# EAGLE board kkctbn relay (EAGLE 9.6.1)
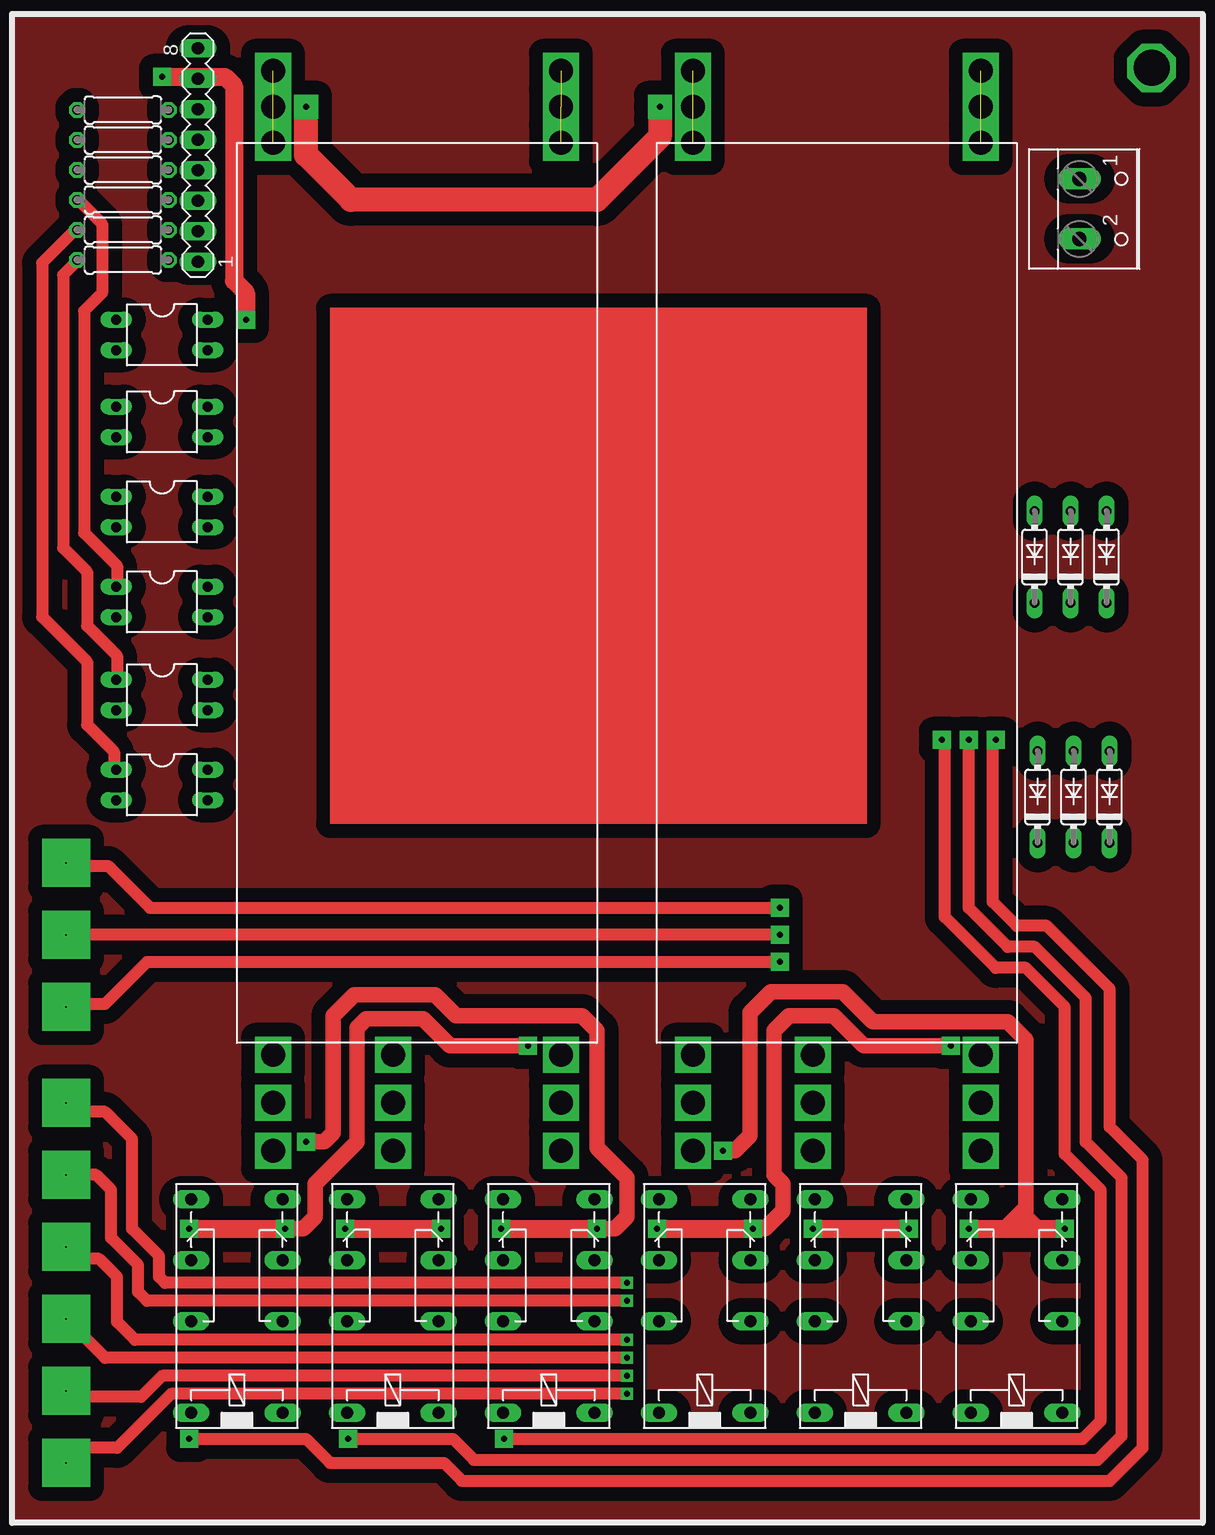
[diagram p0: board, top side]
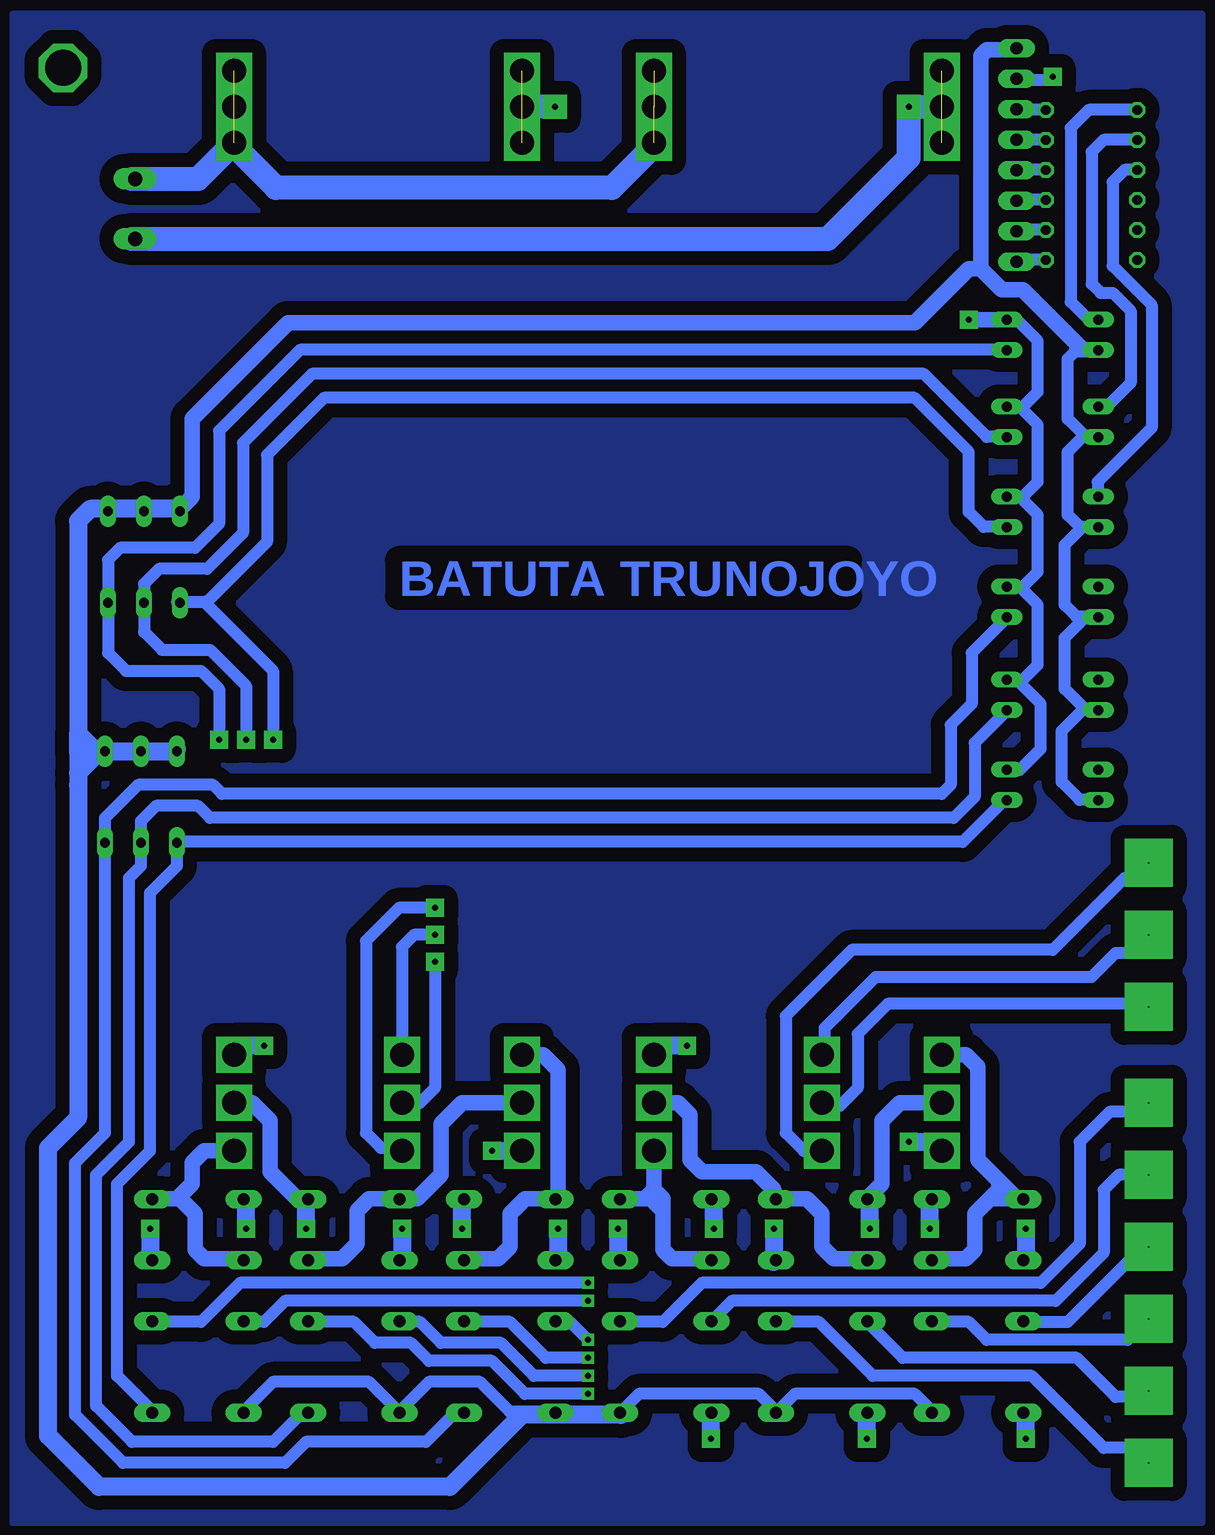
[diagram p1: board, bottom side, seen from below]

No outline drawn. Coordinates in mm, seen from the top.
Copper layers (1*16): Top 0.035mm / dielectric 1.5mm / Bottom 0.035mm
Design rules "default *": minimum track width 6mil, minimum drill 0.35mm, track to track 46mil, track to pad 46mil, pad to pad 6mil, via to via 6mil, smd to smd 46mil, copper to edge 40mil, drill to drill 6mil, minimum pad ring 10mil, minimum via ring 8mil, stop-mask expansion 4mil, vias tented up to drill 0mil, thermal gap 10mil

## Footprints (pad centres in the part's own frame; a part is rotated, then mirrored left to right if it is on the bottom)
DIL04 = drill 0.813 long: 1 -1.27,-3.81; 2 1.27,-3.81; 3 1.27,3.81; 4 -1.27,3.81
MA08-1 = drill 1.016 long: 1 -8.89,0; 2 -6.35,0; 3 -3.81,0; 4 -1.27,0; 5 1.27,0; 6 3.81,0; 7 6.35,0; 8 8.89,0
0207/7 = drill 0.813 octagon: 1 -3.81,0; 2 3.81,0
351 = drill 1.016 long: 1 -3.81,-3.81; 16 -3.81,3.81; O1 8.89,-3.81; O2 8.89,3.81; P1 3.81,-3.81; P2 3.81,3.81; S1 13.97,-3.81; S2 13.97,3.81
DO35-7A = drill 0.813 long: A 3.81,0; C -3.81,0
W237-102 = drill 1.194 long: 1 -2.5,-1.27; 2 2.5,-1.27

## Placement (x,y rotation side)
E$7  [DIL04]  110,69.75 270 top
E$8  [DIL04]  110,62 270 top
E$9  [DIL04]  110,54.5 270 top
E$10  [DIL04]  110,77.25 270 top
E$11  [DIL04]  110,84.75 270 top
E$12  [DIL04]  110,92 270 top
E$13  [MA08-1]  113,107 90 top
E$14  [0207/7]  106.75,98.25 0 top
E$15  [0207/7]  106.75,110.75 0 top
E$16  [0207/7]  106.75,108.25 0 top
E$17  [0207/7]  106.75,105.75 0 top
E$18  [0207/7]  106.75,103.25 0 top
E$19  [0207/7]  106.75,100.75 0 top
E$20  [351]  116.25,6 90 top
E$21  [351]  129.25,6 90 top
E$22  [351]  142.25,6 90 top
E$23  [351]  155.25,6 90 top
E$24  [351]  168.25,6 90 top
E$25  [351]  181.25,6 90 top
E$26  [DO35-7A]  189,53.5 90 top
E$27  [DO35-7A]  188.75,73.5 90 top
E$32  [W237-102]  187.75,102.5 270 top
E$33  [DO35-7A]  183,53.5 90 top
E$34  [DO35-7A]  186,53.5 90 top
E$35  [DO35-7A]  182.75,73.5 90 top
E$36  [DO35-7A]  185.75,73.5 90 top

## Library data of the parts
E$7-E$12 = ic-package
E$13 = con-lstb
E$14-E$19 = rcl
E$20-E$25 = relay
E$26 E$27 E$33-E$36 = diode
E$32 = con-wago-500

## Tracks (layer width: path | path; a pad name or v marks a point on that pad's centre or on a via)
KLM
  pour Top: 97.5,118.75 196.75,118.75 196.75,-7 97.5,-7
MLK
  pour Bottom: 97.5,118.75 196.75,118.75 196.75,-7 97.5,-7
S$1  (via drill 0.1 pad 4)
  other vias: 102,48
S$2  (via drill 0.1 pad 4)
  other vias: 102,42
S$3  (via drill 0.1 pad 4)
  other vias: 102,36
S$4  (via drill 0.1 pad 4)
  other vias: 102,28
S$5  (via drill 0.1 pad 4)
  other vias: 102,22
S$6  (via drill 0.1 pad 4)
  other vias: 102,16
S$7  (via drill 0.1 pad 4)
  other vias: 102,10
S$8  (via drill 0.1 pad 4)
  other vias: 102,4
S$9  (via drill 0.1 pad 4)
  other vias: 102,-2
S$10  (via drill 3 pad 4)
  other vias: 192.5,114.25
S$52  (via drill 0.5 pad 1.5)
  Top 1.3: 158.75,17.5 160.25,17.5 161.75,19 161.75,21.25 161,22 161,34 162.25,35.25 166,35.25 168.5,32.75 v175.75,32.75
  Top 1.5: v159.25,17.5 158.75,17.5 v151.25,17.5
  Bottom 1.5: v159.25,17.5 159.25,20 | v151.25,17.5 151.25,15 | v175.75,32.75 178.25,32.75
S$53  (via drill 0.5 pad 1.5)
  Bottom 1: 113.75,90.75 172.75,90.75 179.5,84 179.5,76.25 181.5,74.25 187.75,74.25 188.75,73.25 188.75,65.5 187.25,64 181,64 179.5,62.5 v179.5,58.25
S$60
  Bottom 1: 113.75,60.75 116.5,58 116.5,53.5 118.25,51.75 180.25,51.75 181.25,52.75 184.75,52.75 186,51.5 186,47.75 187,46.75 187,24.75 189.75,22 189.75,2.75 186.75,-0.25 175,-0.25 172.5,2.25 172,2.25
S$61
  Bottom 1: 113.75,68.5 116.75,65.5 116.75,61.25 118.5,59.5 118.5,54.5 119.25,53.75 179.25,53.75 180,54.5 186.25,54.5 189,51.75 189,25.5 191.5,23 191.5,2 187.5,-2 174,-2 172.25,-0.25 162.25,-0.25 159.75,2.25 159,2.25
S$62  (via drill 0.5 pad 1.5)
  Bottom 1: 113.75,83.5 115.5,83.5 120.75,88.75 171.75,88.75 177.5,83 177.5,75.5 180.5,72.5 184.5,72.5 185.75,71.25 185.75,69.75 185.75,69.5 185.75,67.25 184.25,65.75 180.25,65.75 177.25,62.75 v177.25,58.25
S$63
  Bottom 1: 108,90.75 108.75,90 108.75,85 107.25,83.5 | 106.25,83.5 107.25,83.5 | 107.25,83.5 107.5,83.5 108.75,82.25 108.75,77 107.75,76 107.5,76 | 107.5,76 106.25,76 | 107.5,76 109,74.5 109,69.5 108,68.5 107.25,68.5 | 107.25,68.5 106.25,68.5 | 107.25,68.5 109,66.75 109,62.5 107.25,60.75 | 106,60.75 107.25,60.75 | 107.25,60.75 107.5,60.75 109.25,59 109.25,54.75 107.75,53.25 106.25,53.25
  Bottom 1.3: 182.75,77.5 181.75,78.5 181.75,85 173.75,93 121.5,93 117,97.5 116,97.5 | 113,115.75 115.5,115.75 116,115.25 116,97.5 | 116,97.5 114.25,95.75 112.5,95.75 107.5,90.75 | 108,90.75 107.5,90.75 | 107.5,90.75 106.25,90.75
S$64
  Bottom 1: 110.5,98.25 113,98.25
S$65
  Bottom 1: 110.5,100.75 113.25,100.75
S$66
  Bottom 1: 110.5,103.25 113.25,103.25
S$67
  Bottom 1: 110.5,105.75 113,105.75
S$68
  Bottom 1: 110.5,108.25 113.25,108.25
S$69
  Bottom 1: 110.5,110.75 113.25,110.75
S$70
  Bottom 1: 102.75,110.75 107,110.75 108.5,109.25 108.5,94.75 107,93.25 106,93.25
S$71
  Bottom 1: 103,108.25 105.75,108.25 106.75,107.25 106.75,96.25 106,95.5 105,95.5 103.5,94 103.5,88 105.5,86 106.25,86
S$72
  Bottom 1: 103,105.75 104,105.75 105,104.75 105,97.75 101.75,94.5 101.75,84.25 106.25,79.75 106.25,78.5
S$73
  Top 1: 103,103.25 105,101.25 105,95.5 103.5,94 103.5,75.5 106.25,72.75 106.25,71
S$74
  Top 1: 103,98.25 101.75,97 101.75,74.25 103.75,72.25 103.75,67.75 106.25,65.25 106.25,63.25
S$75
  Top 1: 102.75,100.75 100,98 100,68.5 103.75,64.75 103.75,59.5 106,57.25 106,55.75
S$76  (via drill 2)
  Bottom 1: 113.5,20 113,20
  Bottom 1.3: v119.25,32 117.25,32 116.25,31 116.25,23.25 114.5,21.5 | 114.5,20.75 114.5,20 | 120,15 117.25,15 116.5,15.75 116.5,18.75 115.25,20 | 115.25,20 114.5,20 | 113,20 112.5,20 | 114.5,20 113,20 | 113,20 114.5,21.5 | 114.5,21.5 114.5,20.75 | 114.5,20.75 115.25,20
S$77  (via drill 2)
  other vias: 143.25,32
S$78  (via drill 2)
  other vias: 154.25,32
S$79  (via drill 2)
  other vias: 178.25,32
S$80
  Bottom 1: 112.5,9.75 108.75,9.75 103.5,15 102.5,15
S$81
  Bottom 1: 102.75,9.25 103.75,8.25 115.5,8.25 117,9.75 120.25,9.75
S$82  (via drill 2)  (2 unrouted)
  other vias: 119.25,108 119.25,111 119.25,114
S$83  (via drill 2)  (2 unrouted)
  other vias: 143.25,108 143.25,111 143.25,114
S$85
  Bottom 2: 143.25,107.75 146.75,104.25 174.75,104.25 178.25,107.75
S$86  (via drill 2)
  Bottom 1.3: 125.5,20 124.25,21.25 124.25,26.5 122.75,28 v119.25,28
S$87
  Bottom 1.3: 159.25,15 156.25,15 155.25,16 155.25,18.75 154,20 151.5,20
S$88  (via drill 2)
  other vias: 119.25,24
S$89  (via drill 2)
  other vias: 164.25,24
S$90  (via drill 2)  (2 unrouted)
  Bottom 2: 186.75,105 181.25,105 v178.25,108
  other vias: 178.25,111 178.25,114
S$91  (via drill 2)
  Bottom 1.3: 144,20 143.5,20 142.5,19 | 142.5,19 142.5,18 142.5,15.75 141.75,15 138.5,15 | v143.25,24 143.25,20.75 | 146,20 144,20 | 144,20 143.25,20.75 | 143.25,20.75 142.5,20 142.5,19
S$92  (via drill 2)
  Bottom 1.3: v143.25,28 141.25,28 140.25,27 140.25,23.25 139.25,22.25 134.75,22.25 133.25,20.75 133.25,20
S$93  (via drill 2)
  Bottom 1.3: 172,20 173,20 175.25,22.25 175.25,26.5 176.75,28 v178.25,28
S$94
  Bottom 1.3: 125.5,15 128.25,15 129.25,16 129.25,18.75 130.5,20 133,20
S$95  (via drill 2)
  Bottom 1.3: 183,20 182.75,20 181.5,18.75 181.5,15.75 180.75,15 177.5,15 | 185,20 183,20 | 183,20 181.75,21.25 181.75,23 180.75,24 v178.25,24
S$96
  Bottom 1: 102.75,3.5 104.75,3.5 108,6.75 122.5,6.75 125.5,9.75
S$97  (via drill 2)
  Bottom 1.3: 172.25,15 169.25,15 168,16.25 168,19 167,20 163,20 161,22 161,26.25 159.25,28 v154.25,28
S$98
  Bottom 1: 102.75,-0.75 105.75,-0.75 111.75,5.25 125,5.25 129.5,9.75 133,9.75
S$99
  Bottom 1: 103,22 104.5,22 105.75,20.75 105.75,15.5 109.75,11.5 136.75,11.5 138.5,9.75
S$100
  Bottom 1: 102.75,27.25 105.25,27.25 107.75,24.75 107.75,16.25 111,13 139.25,13 142.5,9.75 146.25,9.75
S$101
  Bottom 1: 102,36.25 123.75,36.25 126.25,33.75 126.25,29.25 127.75,27.75 129.25,27.75
S$102
  Bottom 1: 129,32 129,34.25 124.75,38.5 106.75,38.5 104.75,40.5 102.5,40.5
S$103  (via drill 2)
  Bottom 1: 102.5,46.75 104,46.75 110,40.75 126.75,40.75 132.25,35.25 132.25,25.5 130.75,24 v129.25,24
S$104  (via drill 0.5 pad 1)
  Top 1: v148.75,6.75 105.25,6.75 102.75,9.25
  Bottom 1: v148.75,6.75 152.25,6.75 155.25,9.75 159,9.75
S$105
  Bottom 1: 120,2.25 121.5,3.75 131.5,3.75 133,2.25 134.5,3.75 144.5,3.75 146,2.25 155.25,2.25 157.75,4.75 162,4.75 164.5,2.25 167,4.75 175,4.75 177.5,2.25
S$106  (via drill 0.5 pad 1.5)
  Top 1: v161.5,42 103.25,42
  Bottom 1: v161.5,42 163.25,42 164.25,41 164.25,32.25
S$107  (via drill 0.5 pad 1.5)
  Bottom 1: v161.5,44.25 164.5,44.25 167.25,41.5 167.25,25.5 166,24.25 164.25,24.25
S$108  (via drill 0.5 pad 1)
  Top 1: v148.75,8.25 107.75,8.25 106.25,9.75 106.25,13.5 104.75,15 102.5,15
  Bottom 1: v148.75,8.25 150.25,9.75 151.5,9.75
S$109  (via drill 0.5 pad 1)
  Top 1: v148.75,5.25 110,5.25 108.25,3.5 102.75,3.5
  Bottom 1: v148.75,5.25 153.25,5.25 156,8 161,8 162.75,9.75 164.5,9.75
S$110  (via drill 0.5 pad 2, 2)  (2 unrouted)
  Top 2: v151.5,111 151.5,108.5 146.25,103.25 125.75,103.25 122,107 122,110.75
  Bottom 2: v151.5,111 v154.25,111
  other vias: 154.25,108 154.25,114
S$111  (via drill 0.5 pad 1.5, 2)
  Top 1: 101.75,36.25 105.25,36.25 108.75,39.75 v161.5,39.75
  Bottom 1: v161.5,39.75 161.5,29.25 162.75,28 v164.25,28
S$112  (via drill 2)
  other vias: 129.25,28
S$113
  Top 1: 102.75,47.75 105.5,47.75 109,44.25 161.25,44.25
S$114  (via drill 0.5 pad 1.5)
  Top 1: v112.25,0 122,0 124,-2 133.5,-2 135,-3.5 189,-3.5 191.75,-0.75 191.75,23.25 189,26 189,37.5 183.75,42.75 181.25,42.75 179.25,44.75 179.25,57.5
  Bottom 1.5: v112.25,0 112.25,2
S$115  (via drill 0.5 pad 1.5)
  Top 1: v125.5,0 134.25,0 136,-1.75 188,-1.75 190,0.25 190,21.75 187,24.75 187,36.75 182.75,41 180.5,41 177.25,44.25 177.25,57.5
  Bottom 1.5: v125.5,0 125.5,2
S$116  (via drill 0.5 pad 1.5)
  Top 1: v138.5,0 186.75,0 188.25,1.5 188.25,20.75 185.25,23.75 185.25,36 182,39.25 179.5,39.25 175.25,43.5 175.25,57.5
  Bottom 1.5: v138.5,0 138.5,2
S$117
  Bottom 1: 185,2.25 188,5.25 188,21.25 185.25,24 185.25,45.5 183,47.75 183,49.75 | 183,49.75 183,50 | 114,53.25 117.5,49.75 183,49.75
S$119  (via drill 0.5 pad 1.5)
  Top 1: v110,113.5 110.25,113.25 110.75,113.25
  Top 1.5: v110,113.5 115.25,113.5 116,112.75 116,96.5 117,95.5 v117,93.25
  Bottom 1: 113.75,93.25 113.25,93.25 113,93.25 111.25,91.5 111.25,87.25 112.5,86 112.75,86 | 112.75,86 113.75,86 | 112.75,86 111.25,84.5 111.25,79.75 112.5,78.5 112.75,78.5 | 112.75,78.5 113.75,78.5 | 112.75,78.5 111.25,77 111.25,72.25 112.5,71 112.75,71 | 112.75,71 113.75,71 | 112.75,71 111.25,69.5 111.25,64.5 112.5,63.25 113,63.25 | 113,63.25 113.75,63.25 | 113,63.25 111,61.25 111,57.5 112.75,55.75 113.75,55.75
  Bottom 1.3: v117,93.25 113.25,93.25
S$120  (via drill 0.5 pad 1)
  Top 1: v148.75,11.5 108.75,11.5 108,12.25 108,14.5 105.75,16.75 105.75,20.75 104.5,22 102.75,22
  Bottom 1: v148.75,11.5 174,11.5 175.75,9.75 177.5,9.75
S$121  (via drill 0.5 pad 1)
  Top 1: v148.75,13 110.25,13 109.75,13.5 109.75,15.25 107.5,17.5 107.5,25 105.25,27.25 102.75,27.25 103,27
  Bottom 1: v148.75,13 177.75,13 181,9.75 185,9.75
S$122  (via drill 0.5 pad 1.5)
  Bottom 1: 113.75,76 115.75,76 117,77.25 117,82.25 121.5,86.75 170.75,86.75 175.5,82 175.5,74.75 180.5,69.75 180.75,69.75 | 183,69.75 180.75,69.75 | 180.75,69.75 175,64 v175,58.25
S$123  (via drill 0.5 pad 1.5)
  Top 1.5: v125.25,17.5 v133.25,17.5
  Bottom 1.5: v125.25,17.5 125.25,20 | v133.25,17.5 133.25,14.75
S$124  (via drill 0.5 pad 1.5)
  Top 1.3: v146.25,17.5 147.75,17.5 148.75,18.5 148.75,21.75 146.25,24.25 146.25,34 145,35.25 134.5,35.25 132.75,37 126,37 124.25,35.25 124.25,25.5 123.5,24.75 v122,24.75
  Top 1.5: v138.25,17.5 v146.25,17.5
  Bottom 1.5: v138.25,17.5 138.25,20 | v146.25,17.5 146.25,15 | v122,24.75 119.5,24.75
S$125  (via drill 0.5 pad 2)
  Bottom 2: 186.75,100 128.75,100 122,106.75 v122,111 119,111
S$126  (via drill 2)
  other vias: 129.25,32
S$127  (via drill 0.5 pad 1)
  Top 1: v148.75,3.75 110.75,3.75 106.25,-0.75 103,-0.75
  Bottom 1: v148.75,3.75 154,3.75 156.75,6.5 162,6.5 163.5,8 166.5,8 168.25,9.75 172.25,9.75
S$128  (via drill 0.5 pad 1.5)
  Top 1.3: v120.25,17.5 121.75,17.5 122.75,18.5 122.75,21.25 126.25,24.75 126.25,34.25 127,35 131.75,35 134,32.75 v140.5,32.75
  Top 1.5: v112.25,17.5 v120.25,17.5
  Bottom 1.5: v120.25,17.5 120.25,20 | v112.25,17.5 112.25,15 | v140.5,32.75 143.25,32.75
S$129  (via drill 0.5 pad 1.5, 2)
  Bottom 1.5: v156.75,24 v154.25,24
S$131  (via drill 2)
  other vias: 164.25,32
S$132
  Bottom 1.5: 183,77.5 190.25,77.5 191.25,76.5 191.25,58.75 | 146,2 154.25,2 160.25,-4 189.5,-4 193.75,0.25 193.75,24.25 191.25,26.75 191.25,54.5 191.25,55.5 | 191.25,57.25 191.25,55.5 | 183,57.5 183.25,57.25 189.5,57.25 | 189.75,57.25 191.25,57.25 | 191.25,57.25 191.25,58.75 | 191.25,58.75 189.75,57.25 | 189.75,57.25 189.5,57.25 | 189.5,57.25 191.25,55.5
S$133  (via drill 0.5 pad 1.5)
  Top 1.5: v164.25,17.5 v172.25,17.5
  Bottom 1.5: v164.25,17.5 164.25,15 | v172.25,17.5 172.25,20
S$137  (via drill 0.5 pad 1.5)
  Top 1.3: 182,17.5 182,18.5 | 182,18.5 182,19.25 | 157,24 157.75,24 159,25.25 159,35.5 160.75,37.25 166.75,37.25 169.25,34.75 180.5,34.75 182,33.25 182,20 182,19.25 | 182,18.5 183,17.5 | 183,17.5 184.25,17.5 | 183,17.5 180.25,17.5 182,19.25
  Top 1.5: v185.25,17.5 184.25,17.5 182,17.5 180.25,17.5 v177.25,17.5
  Bottom 1.5: v185.25,17.5 185.25,15 | v177.25,17.5 177.25,20
S$138
  Bottom 1.3: 151.25,20 151.25,30.75 152.5,32 154,32
S$141
  Bottom 1: 113,113.25 110,113.25
(copper drawn outside any net)
  shapes: Top area x1

## Text on the board
Bottom: BATUTA TRUNOJOYO